# Altium PCB PCB1.PcbDoc
Units mm, origin at the board's own origin, x right, y up, seen from the top; angles counter-clockwise.
Board outline 55.1 x 27.54 mm, 2 copper layers (Top Layer, Bottom Layer); 21 components, 198 nets, 233 pads, 16 vias.
Unrouted connection lines stored in the file: 113.
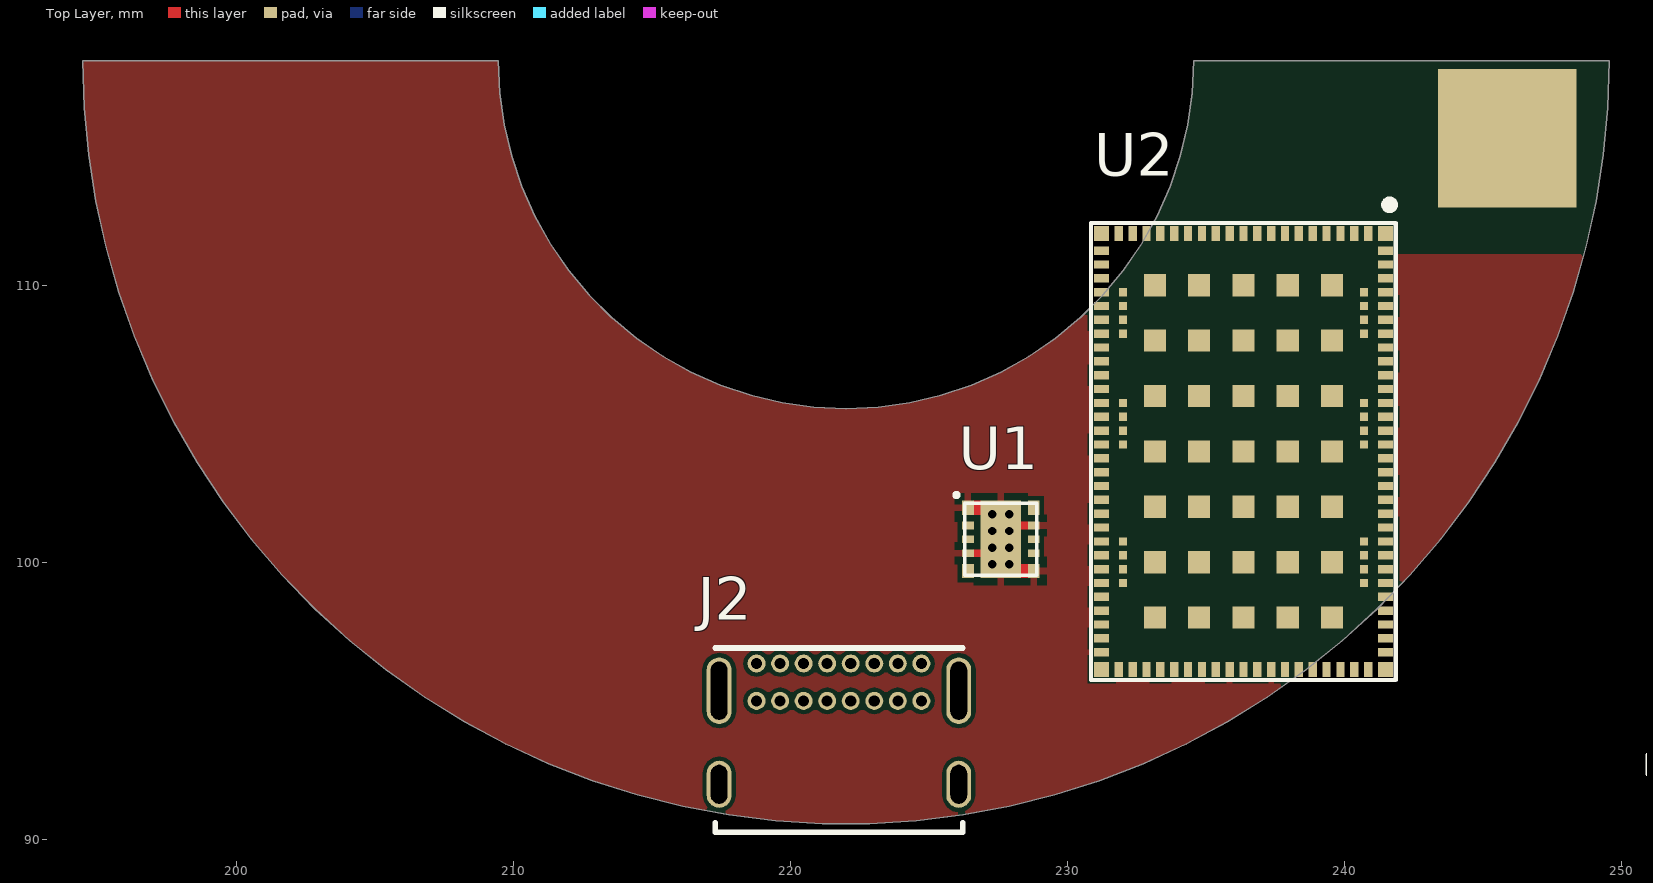
[diagram p0: Top Layer view]
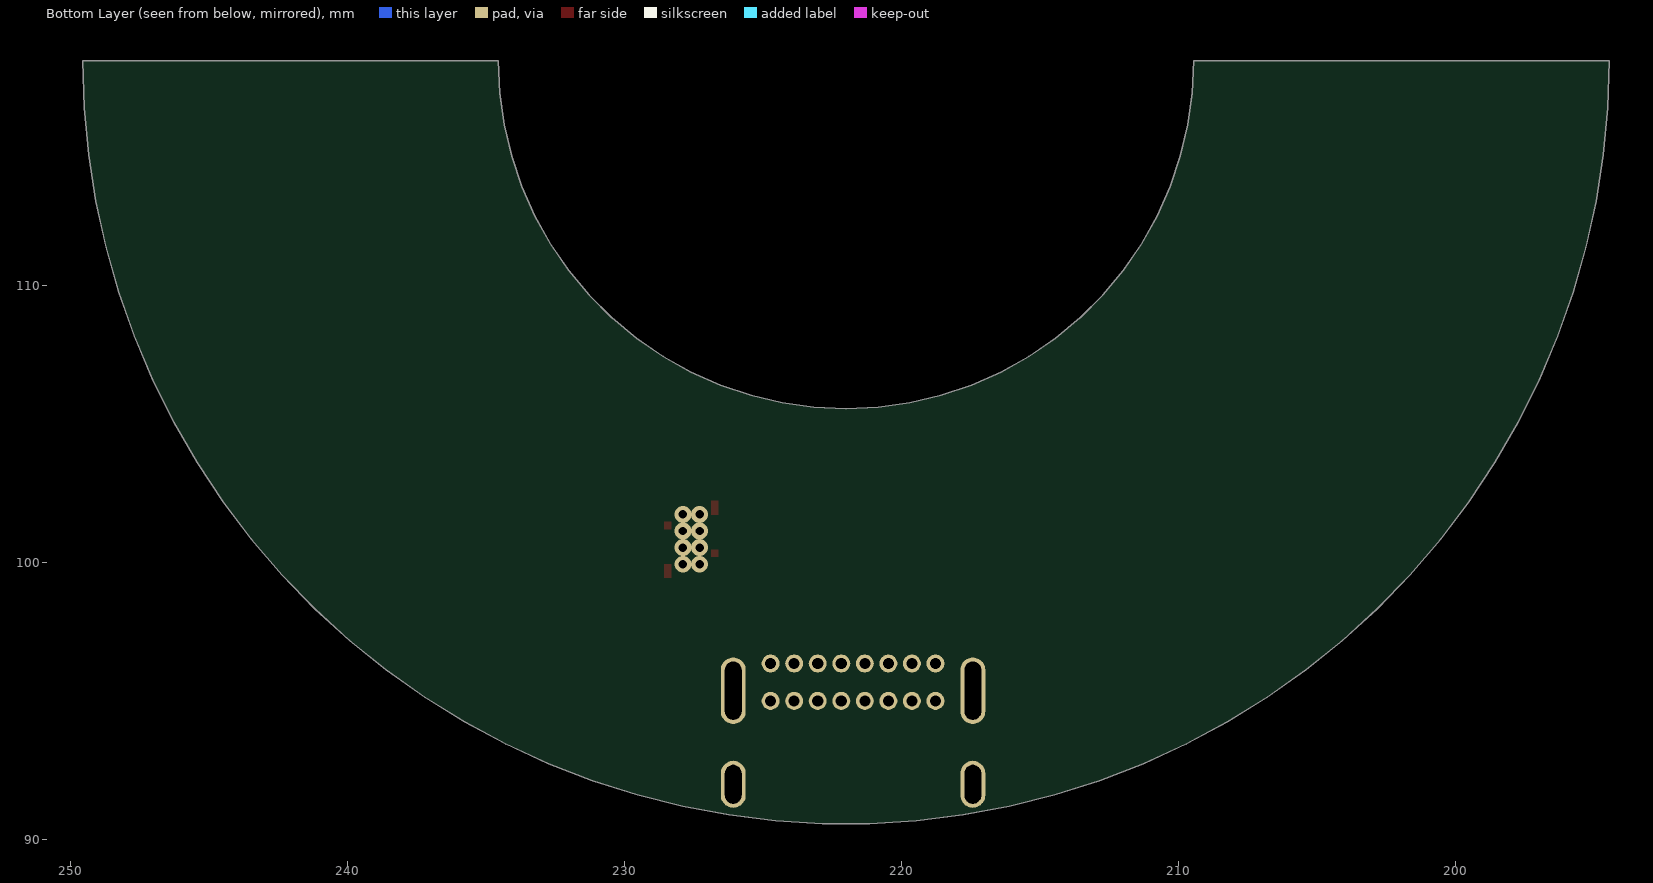
[diagram p1: Bottom Layer view, seen from below]

## Layer stack, top to bottom
Top Solder: solder mask 0.0102, Solder Resist, Dk 3.5
Top Layer: signal copper 0.0356
Dielectric 1: dielectric 0.32, FR-4, Dk 4.8
Bottom Layer: signal copper 0.0356
Bottom Solder: solder mask 0.0102, Solder Resist, Dk 3.5

## Board outline
194.446,118.11 194.498,116.414 194.655,114.724 194.915,113.048 195.278,111.39 195.742,109.758 196.306,108.158 196.968,106.595 197.724,105.076 198.573,103.607 199.51,102.192 200.532,100.838 201.636,99.55 202.817,98.332 204.071,97.188 205.393,96.125 206.778,95.144 208.221,94.251 209.716,93.448 211.257,92.739 212.84,92.126 214.457,91.612 216.102,91.198 217.77,90.886 219.454,90.678 221.148,90.573 222.844,90.573 224.538,90.678 226.222,90.886 227.89,91.198 229.535,91.612 231.152,92.126 232.735,92.739 234.276,93.448 235.771,94.251 237.214,95.144 238.599,96.125 239.921,97.188 241.174,98.332 242.356,99.55 243.46,100.838 244.482,102.192 245.419,103.607 246.268,105.076 247.024,106.595 247.686,108.158 248.25,109.758 248.714,111.39 249.077,113.048 249.337,114.724 249.494,116.414 249.546,118.11 234.546,118.11 234.492,116.952 234.332,115.804 234.067,114.676 233.699,113.576 233.23,112.516 232.666,111.503 232.011,110.547 231.271,109.655 230.451,108.835 229.559,108.095 228.603,107.44 227.59,106.876 226.53,106.407 225.43,106.039 224.302,105.774 223.154,105.614 221.996,105.56 220.838,105.614 219.69,105.774 218.562,106.039 217.462,106.407 216.402,106.876 215.389,107.44 214.433,108.095 213.541,108.835 212.721,109.655 211.981,110.547 211.326,111.503 210.762,112.516 210.293,113.576 209.925,114.676 209.66,115.804 209.5,116.952 209.446,118.11

## Design rules (kind name [scope] priority, off if disabled: settings)
Clearance [All] p1: gap=0.15 ignorepadtopadclearanceinfootprint=FALSE
PolygonConnect [All] p1: connectstyle=Relief reliefconductorwidth=0.254 reliefentries=4 polygonreliefangle="90 Angle" airgapwidth=0.254
RoutingVias [All] p1: holewidth=0.711 width=1.27 viastyle="Through Hole" minholewidth=0.711 minwidth=1.27 maxholewidth=0.711 maxwidth=1.27
SolderMaskExpansion [All] p1: expansion=0.102 istentingtop=FALSE
Width [All] p1: maxlimit=0.254 minlimit=0.254 preferedwidth=0.254
30 further rules are at their usual default settings.

## Classes and differential pairs
net class SWD: nRESET nRF52_P0.18/RESET nRF52_P1.00 nRF52_SWDCLK nRF52_SWDIO P0.22 SWDCLK SWDIO
net class GPIO: BUTTON1 BUTTON2 NetQ2_2 NetQ2_5 NetQ3_2 NetQ3_5 nRF52_P0.02/AIN0 nRF52_P0.03/AIN1 nRF52_P0.05/AIN3 nRF52_P0.06 nRF52_P0.07 nRF52_P0.08 nRF52_P0.09/NFC1 nRF52_P0.10/NFC2 nRF52_P0.11 nRF52_P0.13 nRF52_P0.14 nRF52_P0.15 nRF52_P0.17 nRF52_P0.20 nRF52_P0.22 nRF52_P0.24 nRF52_P0.26 nRF52_P1.01 nRF52_P1.02 nRF52_P1.03 nRF52_P1.04 nRF52_P1.05 nRF52_P1.07 nRF52_P1.08 nRF52_P1.09 nRF52_P1.10 nRF52_P1.11 nRF52_P1.12 nRF52_P1.13 nRF52_P1.14 nRF52_P1.15 P0.00 P0.01 P0.02 P0.03 P0.04 P0.05 P0.06 P0.07 P0.08 P0.09 P0.10 P0.11 P0.12 P0.13/AIN0 P0.14/AIN1 P0.15/AIN2 P0.16/AIN3 P0.17/AIN4 P0.18/AIN5 P0.19/AIN6 P0.20/AIN7 P0.21 P0.22 P0.23 P0.24 P0.25 P0.26 P0.27 P0.28 P0.29 P0.30 P0.31 SWITCH1 SWITCH2
net class COEX: COEX1 COEX2 GPS_EN

## Components (designator, comment, footprint, x,y, rotation, side; value= is the part's Value field where it differs from the comment)
A1 "" ACAG0301-1575-T 258.602,96.918 r0 top value=ACAG0301-1575-T
A2 "P822601" P822601 279.781,143.51 r90 top
A3 "2450AT18D0100" 2450AT18D0100_STD-L 252.984,97.282 r0 top
C1 "N.C." CAPC0603X03L_C 332.74,181.102 r0 top
C2 "N.C." CAPC0603X03L_C 324.104,181.102 r0 top
C3 "N.C." CAPC0603X03L_C 328.422,181.102 r0 top
C4 "N.C." CAPC0603X03L_C 302.514,181.102 r0 top
C5 "N.C." CAPC0603X03L_C 306.832,181.102 r0 top
C6 "N.C." CAPC0603X03L_C 311.15,181.102 r0 top
C7 "N.C." CAPC0603X03L_C 315.468,181.102 r0 top
C8 "4.7µF" CAPC1005X04L 251.841,92.71 r0 top
C9 "N.C." CAPC0603X03L_C 292.227,181.102 r0 top
C10 "N.C." CAPC0603X03L_C 296.672,180.848 r90 top
C11 "N.C." CAPC0603X03L_C 269.24,180.848 r90 top
C12 "N.C." CAPC0603X03L_C 251.46,180.848 r90 top
C13 "N.C." CAPC0603X03L_C 257.429,180.848 r90 top
C14 "N.C." CAPC0603X03L_C 263.398,180.848 r90 top
J2 "USB4085-GF-A_revA" GCT_USB4085-GF-A_REVA 221.742,92.329 r0 top
R4 "N.C." CAPC0603X03L_C 319.786,181.102 r0 top
U1 "SKY65943-11" SKY65943-11 227.584,100.838 r0 top
U2 "nRF9160-SICA" LGA50P1600X1050X104-161N 236.347,104.013 r270 top

## Footprints (in the part's own frame and the unit in brackets; to place one, negate y for a bottom-side part, rotate by r counter-clockwise, add the part's x,y. Pads: shape width x height; smd on the part's side, far side on the other; paste and mask are expansions set on the pad)
2450AT18D0100_STD-L [mm]
  rect 1x0.6 smd mask+0.051: 1(-1.5,-0.65) 2(-1.5,0.65) 2(1.5,-0.65) 2(1.5,0.65)
  Top Layer pour cut-out: -2,-5.05 -2,0.95 2,0.95 2,-5.05
  Bottom Layer pour cut-out: -2,-5.05 -2,0.95 2,0.95 2,-5.05
  silkscreen extent -1.6,-0.8 1.6,0.8, body extent -1.61,-0.81 1.61,0.81, height 1.2
ACAG0301-1575-T [mm]
  rect 0.7x0.74 smd paste-0.05 mask+0.05: 1(-1.3,-0.525) 2(-1.3,0.525)
  rect 0.7x1.8 smd paste-0.05 mask+0.05: 2(1.3,0)
  Top Layer region: -3,0.155 -3,0.895 -0.75,0.895 -0.75,0.155
  Top Layer region: -2,-0.9 -2,-0.16 -0.75,-0.16 -0.75,-0.9
  Top Layer region: 2,-0.9 0.75,-0.9 0.75,0.9 2,0.9
  Top Layer region: -2,-4.245 -2,-0.75 -1.37,-0.75 -1.37,-4.245
  Top Layer region: -3,-4.245 -1.875,-4.245 -1.875,-3.615 -3,-3.615
  Multi-Layer pour cut-out: -3,1.5 2,1.5 2,-5.1 -3,-5.1
  silkscreen extent -1.68,-0.87 1.68,0.87, body extent -1.6,-0.8 1.6,0.8, height 0.6
CAPC0603X03L_C [mm]
  rect 0.27x0.3 smd: 1(-0.285,0) 2(0.285,0)
  silkscreen extent -0.49,-0.22 0.49,0.22, body extent -0.3,-0.15 0.31,0.15, height 0.3
CAPC1005X04L [mm]
  rect 0.6x0.5 smd: 1(-0.5,0) 2(0.5,0)
  silkscreen extent -0.9,-0.35 0.9,0.35, body extent -0.51,-0.25 0.51,0.25, height 0.5
GCT_USB4085-GF-A_REVA [mm] "USB 2.0 Type C Receptacle Dip Type, PCB Top Mount"
  round 0.65 hole 0.4: A1(-2.975,4.025) A4(-2.125,4.025) A5(-1.275,4.025) A6(-0.425,4.025) A7(0.425,4.025) A8(1.275,4.025) A9(2.125,4.025) A12(2.975,4.025) B1(2.975,2.675) B4(2.125,2.675) B5(1.275,2.675) B6(0.425,2.675) B7(-0.425,2.675) B8(-1.275,2.675) B9(-2.125,2.675) B12(-2.975,2.675)
  oval 0.9x2.4 hole 0.6 slot 2.1 at 90 deg: P1(-4.325,3.045) P2(4.325,3.045)
  oval 0.9x1.7 hole 0.6 slot 1.4 at 90 deg: P3(4.325,-0.335) P4(-4.325,-0.335)
  silkscreen extent -4.47,-2.07 4.47,4.58, body extent -4.51,-4.56 4.52,4.61, height 3.46
LGA50P1600X1050X104-161N [mm]
  rect 0.54x0.54 smd mask+0.05: 1(-7.87,5.12) 21(-7.87,-5.12) 52(7.87,-5.12) 72(7.87,5.12)
  rect 0.54x0.3 smd mask+0.05: 2(-7.87,4.5) 3(-7.87,4) 4(-7.87,3.5) 5(-7.87,3) 6(-7.87,2.5) 7(-7.87,2) 8(-7.87,1.5) 9(-7.87,1) 10(-7.87,0.5) 11(-7.87,0) 12(-7.87,-0.5) 13(-7.87,-1) 14(-7.87,-1.5) 15(-7.87,-2) 16(-7.87,-2.5) 17(-7.87,-3) 18(-7.87,-3.5) 19(-7.87,-4) 20(-7.87,-4.5) 53(7.87,-4.5) 54(7.87,-4) 55(7.87,-3.5) 56(7.87,-3) 57(7.87,-2.5) 58(7.87,-2) 59(7.87,-1.5) 60(7.87,-1) 61(7.87,-0.5) 62(7.87,0) 63(7.87,0.5) 64(7.87,1) 65(7.87,1.5) 66(7.87,2) 67(7.87,2.5) 68(7.87,3) 69(7.87,3.5) 70(7.87,4) 71(7.87,4.5)
  rect 0.3x0.54 smd mask+0.05: 22(-7.25,-5.12) 23(-6.75,-5.12) 24(-6.25,-5.12) 25(-5.75,-5.12) 26(-5.25,-5.12) 27(-4.75,-5.12) 28(-4.25,-5.12) 29(-3.75,-5.12) 30(-3.25,-5.12) 31(-2.75,-5.12) 32(-2.25,-5.12) 33(-1.75,-5.12) 34(-1.25,-5.12) 35(-0.75,-5.12) 36(-0.25,-5.12) 37(0.25,-5.12) 38(0.75,-5.12) 39(1.25,-5.12) 40(1.75,-5.12) 41(2.25,-5.12) 42(2.75,-5.12) 43(3.25,-5.12) 44(3.75,-5.12) 45(4.25,-5.12) 46(4.75,-5.12) 47(5.25,-5.12) 48(5.75,-5.12) 49(6.25,-5.12) 50(6.75,-5.12) 51(7.25,-5.12) 73(7.25,5.12) 74(6.75,5.12) 75(6.25,5.12) 76(5.75,5.12) 77(5.25,5.12) 78(4.75,5.12) 79(4.25,5.12) 80(3.75,5.12) 81(3.25,5.12) 82(2.75,5.12) 83(2.25,5.12) 84(1.75,5.12) 85(1.25,5.12) 86(0.75,5.12) 87(0.25,5.12) 88(-0.25,5.12) 89(-0.75,5.12) 90(-1.25,5.12) 91(-1.75,5.12) 92(-2.25,5.12) 93(-2.75,5.12) 94(-3.25,5.12) 95(-3.75,5.12) 96(-4.25,5.12) 97(-4.75,5.12) 98(-5.25,5.12) 99(-5.75,5.12) 100(-6.25,5.12) 101(-6.75,5.12) 102(-7.25,5.12)
  rect 0.8x0.8 smd mask+0.05: 103(-6,3.2) 103(-6,-1.6) 103(-6,0) 103(-6,1.6) 103(-6,-3.2) 103(-4,3.2) 103(-4,-1.6) 103(-4,0) 103(-4,1.6) 103(-4,-3.2) 103(-2,3.2) 103(-2,1.6) 103(-2,0) 103(-2,-1.6) 103(-2,-3.2) 103(0,3.2) 103(0,1.6) 103(0,0) 103(0,-1.6) 103(0,-3.2) 103(2,3.2) 103(2,1.6) 103(2,0) 103(2,-1.6) 103(2,-3.2) 103(4,3.2) 103(4,-1.6) 103(4,0) 103(4,1.6) 103(4,-3.2) 103(6,3.2) 103(6,-1.6) 103(6,0) 103(6,1.6) 103(6,-3.2)
  rect 0.3x0.3 smd mask+0.05: 104(-5.75,-4.35) 105(-5.25,-4.35) 106(-4.75,-4.35) 107(-4.25,-4.35) 108(-1.75,-4.35) 109(-1.25,-4.35) 110(-0.75,-4.35) 111(-0.25,-4.35) 112(3.25,-4.35) 113(3.75,-4.35) 114(4.25,-4.35) 115(4.75,-4.35) 116(4.75,4.35) 117(4.25,4.35) 118(3.75,4.35) 119(3.25,4.35) 120(-0.25,4.35) 121(-0.75,4.35) 122(-1.25,4.35) 123(-1.75,4.35) 124(-4.25,4.35) 125(-4.75,4.35) 126(-5.25,4.35) 127(-5.75,4.35)
  Top Layer pour cut-out: -8.15,5.4 8.15,5.4 8.15,-5.4 -8.15,-5.4
  silkscreen extent -9.05,-5.5 8.25,5.5, body extent -8.05,-5.3 8.05,5.3, height 1.2
P822601 [mm]
  rect 2x2 smd: 1(-8.89,-2.286) 2(-5.08,-2.286)
  Top Layer region: -21.6,1.254 -24.5,1.254 -24.5,3.754 -21.6,3.754
  Top Layer region: -22.4,-0.846 -24.5,-0.846 -24.5,0.854 -22.4,0.854
  Top Layer region: -21.6,-3.746 -24.5,-3.746 -24.5,-1.246 -21.6,-1.246
  Top Layer region: 24.6,-5.796 12.05,-5.796 12.05,-2.046 24.6,-2.046
  Top Layer region: 24.6,-2.046 21.7,-2.046 21.7,3.754 24.6,3.754
  Top Layer region: -3.67,-7.991 -8.05,-7.991 -8.05,-5.996 -3.67,-5.996
  Top Layer region: -3.67,-5.996 -5.71,-5.996 -5.71,-3.826 -3.67,-3.826
  Top Layer region: -3.67,-3.826 -6.399,-3.826 -6.4,-0.566 -3.67,-0.566
  Top Layer region: -10.45,-7.996 -12.45,-7.996 -12.45,-6.496 -10.45,-6.496
  Top Layer region: -9.2,-6.496 -12.45,-6.496 -12.45,-5.996 -9.2,-5.996
  Top Layer region: -9.45,-7.496 -9.95,-7.496 -9.95,-7.296 -9.45,-7.296
  Top Layer region: -8.45,-7.496 -8.95,-7.496 -8.95,-7.296 -8.45,-7.296
  Top Layer region: -8.45,-7.296 -9.95,-7.296 -9.95,-7.096 -8.45,-7.096
  Top Layer region: -9.45,-7.096 -9.95,-7.096 -9.95,-6.896 -9.45,-6.896
  Top Layer region: -8.45,-7.096 -8.95,-7.096 -8.95,-6.896 -8.45,-6.896
  Top Layer region: -8.6,-6.896 -8.8,-6.896 -8.8,-5.696 -8.6,-5.696
  Top Layer region: -8.2,-5.696 -9.2,-5.696 -9.2,-3.796 -8.2,-3.796
  Top Layer region: -7.3,-3.796 -10.4,-3.796 -10.4,-0.596 -7.3,-0.596
  Top Layer region: -9.45,-9.796 -9.95,-9.796 -9.95,-9.596 -9.45,-9.596
  Top Layer region: -8.45,-9.796 -8.95,-9.796 -8.95,-9.596 -8.45,-9.596
  Top Layer region: -8.45,-9.596 -9.95,-9.596 -9.95,-9.396 -8.45,-9.396
  Top Layer region: -9.45,-9.396 -9.95,-9.396 -9.95,-9.196 -9.45,-9.196
  Top Layer region: -8.45,-9.396 -8.95,-9.396 -8.95,-9.196 -8.45,-9.196
  Top Layer region: -9.6,-9.196 -9.8,-9.196 -9.8,-8.596 -9.6,-8.596
  Top Layer region: -9.45,-8.596 -9.95,-8.596 -9.95,-8.396 -9.45,-8.396
  Top Layer region: -8.45,-8.596 -8.95,-8.596 -8.95,-8.396 -8.45,-8.396
  Top Layer region: -8.45,-8.396 -9.95,-8.396 -9.95,-8.196 -8.45,-8.196
  Top Layer region: -9.45,-8.196 -9.95,-8.196 -9.95,-7.996 -9.45,-7.996
  Top Layer region: -8.45,-8.196 -8.95,-8.196 -8.95,-7.996 -8.45,-7.996
  Top Layer region: -9.6,-11.296 -9.8,-11.296 -9.8,-10.896 -9.6,-10.896
  Top Layer region: -9.45,-10.896 -9.95,-10.896 -9.95,-10.696 -9.45,-10.696
  Top Layer region: -8.45,-10.896 -8.95,-10.896 -8.95,-10.696 -8.45,-10.696
  Top Layer region: -8.45,-10.696 -9.95,-10.696 -9.95,-10.496 -8.45,-10.496
  Top Layer region: -9.45,-10.496 -9.95,-10.496 -9.95,-10.296 -9.45,-10.296
  Top Layer region: -8.45,-10.496 -8.95,-10.496 -8.95,-10.296 -8.45,-10.296
  Top Layer region: 24.75,-11.296 -8.05,-11.296 -8.05,-8.001 24.75,-8.001
  Top Layer region: -10.45,-11.296 -24.65,-11.296 -24.65,-7.996 -10.45,-7.996
  Bottom Layer region: -22.5,-3.546 -24.5,-3.546 -24.5,-2.546 -22.5,-2.546
  Bottom Layer region: -24.196,-2.546 -24.5,-2.546 -24.5,-2.046 -24.196,-2.046
  Bottom Layer region: -22.5,-2.046 -24.5,-2.046 -24.5,-1.046 -22.5,-1.046
  Bottom Layer region: -22.5,-1.046 -22.8,-1.046 -22.8,-0.546 -22.5,-0.546
  Bottom Layer region: -22.5,-0.546 -24.5,-0.546 -24.5,3.754 -22.5,3.754
  Bottom Layer region: -21,-3.546 -22,-3.546 -22,-1.046 -21,-1.046
  Bottom Layer region: -22.5,-5.046 -24.5,-5.046 -24.5,-4.046 -22.5,-4.046
  Bottom Layer region: 7.7,-5.796 6.7,-5.796 6.7,-4.896 7.7,-4.896
  Bottom Layer region: 9.2,-5.796 8.2,-5.796 8.2,-4.896 9.2,-4.896
  Bottom Layer region: 10.7,-5.796 9.7,-5.796 9.7,-4.896 10.7,-4.896
  Bottom Layer region: 13.2,-5.796 11.2,-5.796 11.2,-4.896 13.2,-4.896
  Bottom Layer region: 13.2,-4.896 6.7,-4.896 6.7,-4.596 13.2,-4.596
  Bottom Layer region: 7.7,-4.596 6.7,-4.596 6.7,-3.746 7.7,-3.746
  Bottom Layer region: 9.2,-4.596 8.2,-4.596 8.2,-3.746 9.2,-3.746
  Bottom Layer region: 10.7,-4.596 9.7,-4.596 9.7,-3.746 10.7,-3.746
  Bottom Layer region: 13.2,-4.596 11.2,-4.596 11.2,-3.746 13.2,-3.746
  Bottom Layer region: 6.2,-5.796 5.2,-5.796 5.2,-3.746 6.2,-3.746
  Bottom Layer region: 4.7,-5.796 3.7,-5.796 3.7,-3.746 4.7,-3.746
  Bottom Layer region: -3.86,-7.996 -12.45,-7.996 -12.45,-5.996 -3.86,-5.996
  Bottom Layer region: 24.752,-11.296 -24.648,-11.296 -24.65,-7.996 24.75,-7.996
  Multi-Layer pour cut-out: -39.95,5.08 39.05,5.08 39.05,-7.996 -39.95,-7.996
  silkscreen extent -25.2,-4.25 25.3,4.05, body extent -24.95,-4 25.05,4, height 3.2
SKY65943-11 [mm]
  rect 0.425x0.515 smd mask+0.05: 1(-1.188,1.144) 5(-1.188,-1.144) 6(1.188,-1.144) 10(1.188,1.144)
  rect 0.425x0.275 smd mask+0.05: 2(-1.188,0.5) 3(-1.188,0) 4(-1.188,-0.5) 7(1.188,-0.5) 8(1.188,0) 9(1.188,0.5)
  rect 1.45x2.802 smd paste-2 mask-5: 11(0,0)
  rect 1.55x2.487 on Top Solder: ""(0,0)
  Top Layer region: -0.712,-0.362 -0.987,-0.362 -0.987,-0.637 -0.712,-0.637
  Top Layer region: 0.712,0.363 0.987,0.363 0.987,0.637 0.712,0.637
  Top Layer region: 0.711,-1.4 0.986,-1.4 0.986,-0.887 0.711,-0.887
  Top Layer region: -0.989,0.887 -0.714,0.887 -0.714,1.4 -0.989,1.4
  silkscreen extent -1.65,-1.3 1.3,1.65, body extent -1.25,-1.25 1.25,1.25, height 0.71

## Part data
A1: library part ACAG0301-1575-T, "RF ANT 1.575GHZ CHIP SOLDER SMD", Manufacturer=Abracon, Part number IPS=N.A., Supplier Part Number 1=535-14486-1-ND, Artikkelnr Noca=N.A., ComponentLink1Description=Datasheet, ComponentLink1URL=https://abracon.com/datasheets/ACAG0301-1575-T.pdf, ComponentLink2Description="Supplier link", Footprint Doc=ACAG0301-1575-T, LatestRevisionDate=2018-12-01, Manufacturer Part Number=ACAG0301-1575-T, Part Number=ACAG0301-1575-T, Pin Count=2, Published=2018-12-01, Publisher="Nordic Semiconductor", Supplier 1=Digi-Key, Supplier 2=Mouser, Supplier Part Number 2=815-G0301-1575-T
A2: library part W3796, "ANTENNA PRESTTA OCTABAND LTE", Manufacturer=Ethertronics, Part number IPS=00000009001, Artikkelnr Noca=N.A., ComponentLink1Description=Datasheet, ComponentLink2Description="Supplier link", Footprint Doc=P822601, HelpURL=http://www.ethertronics.com/wp-content/uploads/2016/11/Prestta-P822601-P822602-Standard-Cellular-Octa-Band-20160904.pdf, LatestRevisionDate=2017-07-28, Manufacturer Part Number=P822601, Part Number=P822601, Pin Count=2, Published=2017-07-28, Publisher="Nordic Semiconductor", Supplier 1=moreelectronics.dk, Supplier 2=Digikey, Supplier Part Number 1=P822601, Supplier Part Number 2=939-1057-1-ND
A3: library part "Antenna with GND", "2.45 GHz chip antenna", Manufacturer="Johanson Technology", Part Number="Johanson 2450AT18D0100_STD-L", Part number IPS=00000001415, Supplier Part Number 1=2450AT18D0100E, Artikkelnr Noca=53059035, ComponentLink1Description=Datasheet, ComponentLink2Description="Supplier link", Footprint Doc=2450AT18D0100, HelpURL=http://www.johansontechnology.com/datasheets/antennas/2450AT18D0100.pdf, LatestRevisionDate=2016-06-02, Manufacturer Part Number=2450AT18D0100, Pin Count=4, Published=2016-01-12, Publisher="Nordic Semiconductor", Supplier 1=Digi-Key, Supplier 2=Mouser, Supplier Part Number 2=609-2450AT18D0100E
C1 C2 C3 C4 C5 C6 C7 C9 C10 C11 C12 C13 C14 R4: library part CAP_1, "Not mounted", Part Number=C0201-N.C., Part number IPS=N.A., Artikkelnr Noca=N.A., Assembly="Not mounted", ComponentLink1Description=Datasheet, ComponentLink2Description="Supplier link", Footprint Doc=0201, LatestRevisionDate=2014-11-13, Note="Chip Cap", Pin Count=2, Published=2014-11-13, Publisher="Nordic Semiconductor"
C8: library part CAP, "Capacitor, X5R, ±20%", Part Number=C0402-4µ7, Part number IPS=00000001251, Supplier Part Number 1=490-13252-1-ND, Artikkelnr Noca=20039482, ComponentLink1Description=Datasheet, ComponentLink2Description="Supplier link", Footprint Doc=0402, LatestRevisionDate=2017-11-09, Note=10V, Pin Count=2, Published=2009-05-08, Publisher="Nordic Semiconductor", Supplier 1=Digi-Key
J2: "USB 2.0 Type C Receptacle Dip Type, PCB Top Mount", Manufacturer="Global Connector Technology", PARTREV=A, STANDARD="Manufacturer Recommendations"
U1: "GNSS Low-Noise Amplifier Front-End Module with Integrated Pre-Filter and Post-Filter", Manufacturer=Skyworks, Part number IPS=N.A., Supplier Part Number 1=863-2032-1-ND, Artikkelnr Noca=N.A., ComponentLink1Description=Datasheet, ComponentLink1URL=http://www.skyworksinc.com/uploads/documents/SKY65943_11_204404F.pdf, ComponentLink2Description="Supplier link", ComponentLink2URL=https://www.digikey.com/product-detail/en/skyworks-solutions-inc/SKY65943-11/863-2032-1-ND, Footprint Doc=MCM-10, HelpURL=http://www.skyworksinc.com/Product/3579/SKY65943-11, LatestRevisionDate=2019-04-16, Manufacturer Part Number=SKY65943-11, Part Number=SKY65943-11, Pin Count=10, Published=2019-04-16, Publisher="Nordic Semiconductor", Supplier 1=Digi-Key, Supplier 2=Mouser, Supplier Part Number 2=873-SKY65943-11
U2: "Low power System-in-Package with integrated LTE-M/NB-IoT modem and GPS", Manufacturer="Nordic Semiconductor", Manufacturer Part Number=nRF9160-SICAB00, Part number IPS=N.A., Artikkelnr Noca=N.A., ComponentLink1Description=Datasheet, ComponentLink2Description="Supplier link", Footprint Doc=LGA-161, LatestRevisionDate=2019-03-01, Part Number=nRF9160-SICAB00, Pin Count=161, Published=2019-03-01, Publisher="Nordic Semiconductor", Supplier 1="Nordic Semiconductor", Supplier Part Number 1=nRF9160-SICAB00

## Free pads (board coordinates)
  rect 5x5 smd: 19(245.872,115.316)

## Via types
v1: diameter 0.5, hole 0.25, Top Layer to Bottom Layer, 8 vias
v2: diameter 0.61, hole 0.305, Top Layer to Bottom Layer, 8 vias

## Nets (pads, with @x,y where several pads share a name; then routed paths per layer and width w, separated by ;. In a path a pad name is that pad's centre, name@x,y a point inside that pad or via, vN(x,y) a via of type N, cw(c..) or ccw(c..) an arc to the next point about the centre after c; other vN are vias at no path point)
3V3: C1.2
ANT: C12.2 U2.61
BUTTON1: 
BUTTON2: 
CC1: J2.A5
CC2: J2.B5
COEX1: U2.92
COEX2: U2.91
DEC0: U2.13
DEC1: 
DEC3: 
DEC4_6: 
ENABLE: U2.101
GND: A1.2 A2.2 A3.2 C1.1 C4.1 C5.2 C6.1 C7.1 C8.2 C9.1 C10.1 C12.1 C13.1 C14.1 R4.2 U1.1 U1.4 U1.6 U1.9 U1.11 U2.1 U2.5 U2.6 U2.7 U2.8 U2.9 U2.11 U2.14 U2.17 U2.21 U2.27 U2.31 U2.36 U2.41 U2.44 U2.47 U2.50 U2.52 U2.56 U2.60 U2.62 U2.63 U2.65 U2.66 U2.68 U2.69 U2.72 U2.74 U2.75 U2.76 U2.77 U2.78 U2.79 U2.80 U2.81 U2.82 U2.85 U2.90 U2.94 U2.98 U2.103
  other v1: 286.527,131.624 288.331,131.67 290.247,131.67 286.527,136.46 288.331,136.46 290.247,136.46
  other v2: 227.284,99.938 227.884,99.938 227.284,100.538 227.884,100.538 227.284,101.138 227.884,101.138 227.284,101.738 227.884,101.738
GPS_EN: U2.93
GPS_RF1: C2.2 U2.67
GPS_RF2: C2.1 C3.2
GPS_RF3: C3.1
GPS_RF4: U1.10
GPS_RF5: U1.5
GPS_RF6: R4.1
GPS_RF7: A1.1
MAGPIO0: U2.55
MAGPIO1: U2.54
MAGPIO2: U2.53
NetA2_1: A2.1 C11.2
NetA3_1: A3.1
NetC4_2: C4.2
NetC5_1: C5.1 U1.8
NetC6_2: C6.2 C7.2 U1.3
NetC8_1: C8.1 U2.102
NetC9_2: C9.2 C10.2 U1.2
NetC11_1: C11.1 C13.2 C14.2
NetC17_2: U2.22
NetC29_2: 
NetC30_2: 
NetC33_2: 
NetC37_2: J2.A4 J2.A9 J2.B4 J2.B9
NetC39_1: 
NetC40_2: 
NetC41_1: 
NetC42_2: 
NetC43_2: 
NetCR1_2: 
NetD1_2: J2.A6 J2.B6
NetD1_3: J2.A7 J2.B7
NetD2_A1: 
NetD2_A2: 
NetD2_A3: 
NetD2_C1: 
NetD2_C2: 
NetD2_C3: 
NetFB2_1: J2.P1
NetFB3_1: J2.A1 J2.A12 J2.B1 J2.B12
NetL5_2: U1.7
NetL8_2: 
NetL9_2: 
NetLED1_1: 
NetLED1_2: 
NetLED2_1: 
NetLED2_2: 
NetLED3_1: 
NetLED3_2: 
NetLED4_1: 
NetLED4_2: 
NetP1_2: 
NetP1_4: 
NetP1_6: 
NetP1_10: 
NetP2_2: 
NetP2_4: 
NetP2_6: 
NetP2_10: 
NetP3_4: 
NetP3_5: 
NetP3_6: 
NetQ1_3: 
NetQ1_5: 
NetQ2_2: 
NetQ2_5: 
NetQ3_2: 
NetQ3_5: 
NetR11_2: 
NetR12_1: 
NetR12_2: 
NetR26_2: 
NetR27_2: 
NetR28_1: 
NetSB2_1: 
NetSB2_2: U2.125
NetSB3_2: 
NetSB4_2: 
NetSB5_2: 
NetSB6_2: 
NetSB8_1: 
NetSW2_2: 
NetTP7_1: U2.124
NetTP19_1: 
NetTP20_1: 
NetTP21_1: 
NetU4_C2: 
NetU4_C3: 
NetU4_C7: 
nRESET: U2.32
nRF52_ANT: 
nRF52_D+: 
nRF52_D-: 
nRF52_P0.00/XL1: 
nRF52_P0.01/XL2: 
nRF52_P0.02/AIN0: 
nRF52_P0.03/AIN1: 
nRF52_P0.04/AIN2: 
nRF52_P0.05/AIN3: 
nRF52_P0.06: 
nRF52_P0.07: 
nRF52_P0.08: 
nRF52_P0.09/NFC1: 
nRF52_P0.10/NFC2: 
nRF52_P0.11: 
nRF52_P0.13: 
nRF52_P0.14: 
nRF52_P0.15: 
nRF52_P0.17: 
nRF52_P0.18/RESET: 
nRF52_P0.20: 
nRF52_P0.22: 
nRF52_P0.23: 
nRF52_P0.24: 
nRF52_P0.25: 
nRF52_P0.26: 
nRF52_P1.00: 
nRF52_P1.01: 
nRF52_P1.02: 
nRF52_P1.03: 
nRF52_P1.04: 
nRF52_P1.05: 
nRF52_P1.06: 
nRF52_P1.07: 
nRF52_P1.08: 
nRF52_P1.09: 
nRF52_P1.10: 
nRF52_P1.11: 
nRF52_P1.12: 
nRF52_P1.13: 
nRF52_P1.14: 
nRF52_P1.15: 
nRF52_SWDCLK: 
nRF52_SWDIO: 
nRF52_VDD_nRF: 
nRF52_XC1: 
nRF52_XC2: 
P0.00: U2.95
P0.01: U2.96
P0.02: U2.97
P0.03: U2.99
P0.04: U2.100
P0.05: U2.2
P0.06: U2.3
P0.07: U2.4
P0.08: U2.15
P0.09: U2.16
P0.10: U2.18
P0.11: U2.19
P0.12: U2.20
P0.13/AIN0: U2.23
P0.14/AIN1: U2.24
P0.15/AIN2: U2.25
P0.16/AIN3: U2.26
P0.17/AIN4: U2.28
P0.18/AIN5: U2.29
P0.19/AIN6: U2.30
P0.20/AIN7: U2.35
P0.21: U2.37
P0.22: U2.38
P0.23: U2.39
P0.24: U2.40
P0.25: U2.42
P0.26: U2.83
P0.27: U2.84
P0.28: U2.86
P0.29: U2.87
P0.30: U2.88
P0.31: U2.89
SCLK: U2.58
SDATA: U2.59
SIM_1V8: U2.49
SIM_CLK: U2.46
SIM_IO: U2.48
SIM_RST: U2.43
SWDCLK: U2.33
SWDIO: U2.34
SWITCH1: 
SWITCH2: 
VBUS: 
VDD: 
VDD_GPIO: U2.12
VDD_IMCU: 
VDD_nRF: 
pads on no net: J2.A8 J2.B8 J2.P2 J2.P3 J2.P4 U1. U2.10 U2.45 U2.51 U2.57 U2.64 U2.70 U2.71 U2.73 U2.104 U2.105 U2.106 U2.107 U2.108 U2.109 U2.110 U2.111 U2.112 U2.113 U2.114 U2.115 U2.116 U2.117 U2.118 U2.119 U2.120 U2.121 U2.122 U2.123 U2.126 U2.127
copper on no net:
  other v1: 276.527,119.66 284.577,156.21

## Polygon pours and split planes (outlines as drawn)
GND on Top Layer "GND_L01_P000" (solid, pour order 0): 194.446,118.11 194.498,116.414 194.655,114.724 194.915,113.048 195.278,111.39 195.742,109.758 196.306,108.158 196.968,106.595 197.724,105.076 198.573,103.607 199.51,102.192 200.532,100.838 201.636,99.55 202.817,98.332 204.071,97.188 205.393,96.125 206.778,95.144 208.221,94.251 209.716,93.448 211.257,92.739 212.84,92.126 214.457,91.612 216.102,91.198 217.77,90.886 219.454,90.678 221.148,90.573 222.844,90.573 224.538,90.678 226.222,90.886 227.89,91.198 229.535,91.612 231.152,92.126 232.735,92.739 234.276,93.448 235.771,94.251 237.214,95.144 238.599,96.125 239.921,97.188 241.174,98.332 242.356,99.55 243.46,100.838 244.482,102.192 245.419,103.607 246.268,105.076 247.024,106.595 247.686,108.158 248.25,109.758 248.714,111.39 249.077,113.048 249.337,114.724 249.494,116.414 249.546,118.11 234.546,118.11 234.492,116.952 234.332,115.804 234.067,114.676 233.699,113.576 233.23,112.516 232.666,111.503 232.011,110.547 231.271,109.655 230.451,108.835 229.559,108.095 228.603,107.44 227.59,106.876 226.53,106.407 225.43,106.039 224.302,105.774 223.154,105.614 221.996,105.56 220.838,105.614 219.69,105.774 218.562,106.039 217.462,106.407 216.402,106.876 215.389,107.44 214.433,108.095 213.541,108.835 212.721,109.655 211.981,110.547 211.326,111.503 210.762,112.516 210.293,113.576 209.925,114.676 209.66,115.804 209.5,116.952 209.446,118.11

## Other copper
Top Layer:
  pour cut-out: 249.555,118.11 249.555,111.125 232.41,111.125 232.41,118.11

## Silkscreen, mask and mechanical layers (free items; w line width, h text height)
Mechanical 13:
  the board outline again, w0.254

## Text inside footprints (layer, text, board x,y; h text height)
J2: Mechanical 16 ">PCB Edge" at 227.442,90.254 h1.57